# EAGLE board cvocd-a-panel (EAGLE 9.5.2), part 1 of 2
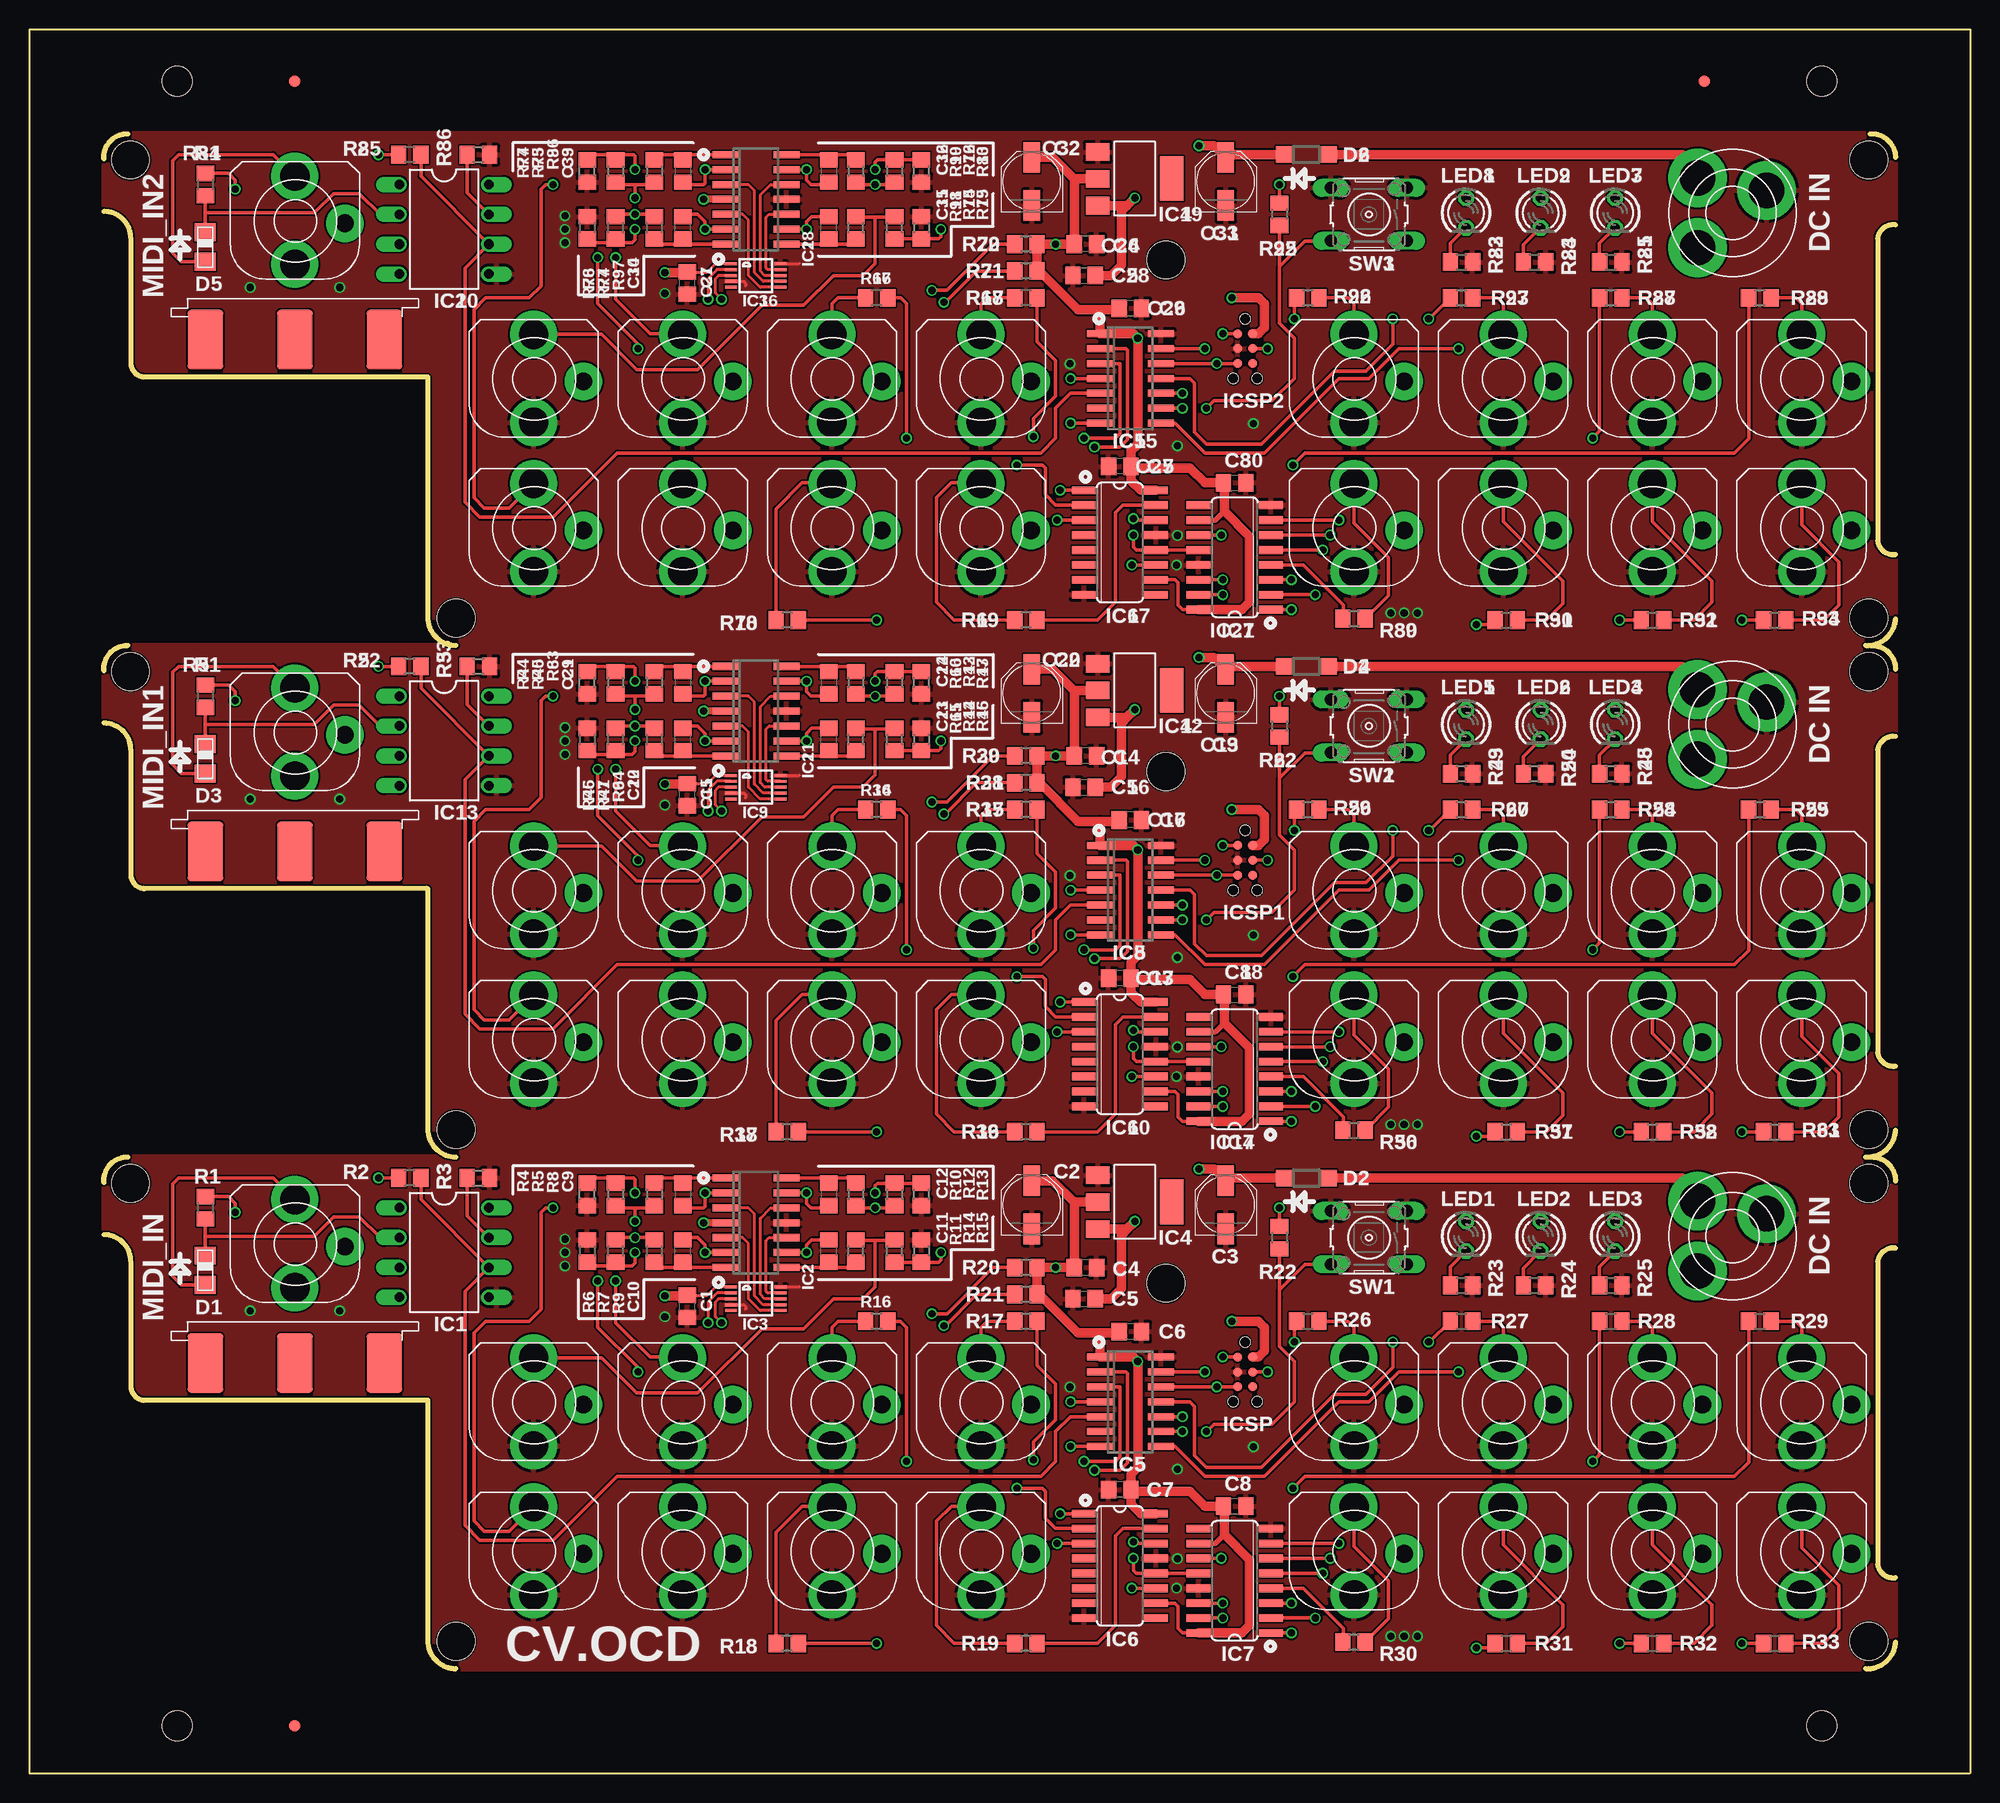
[diagram p0: board, top side]
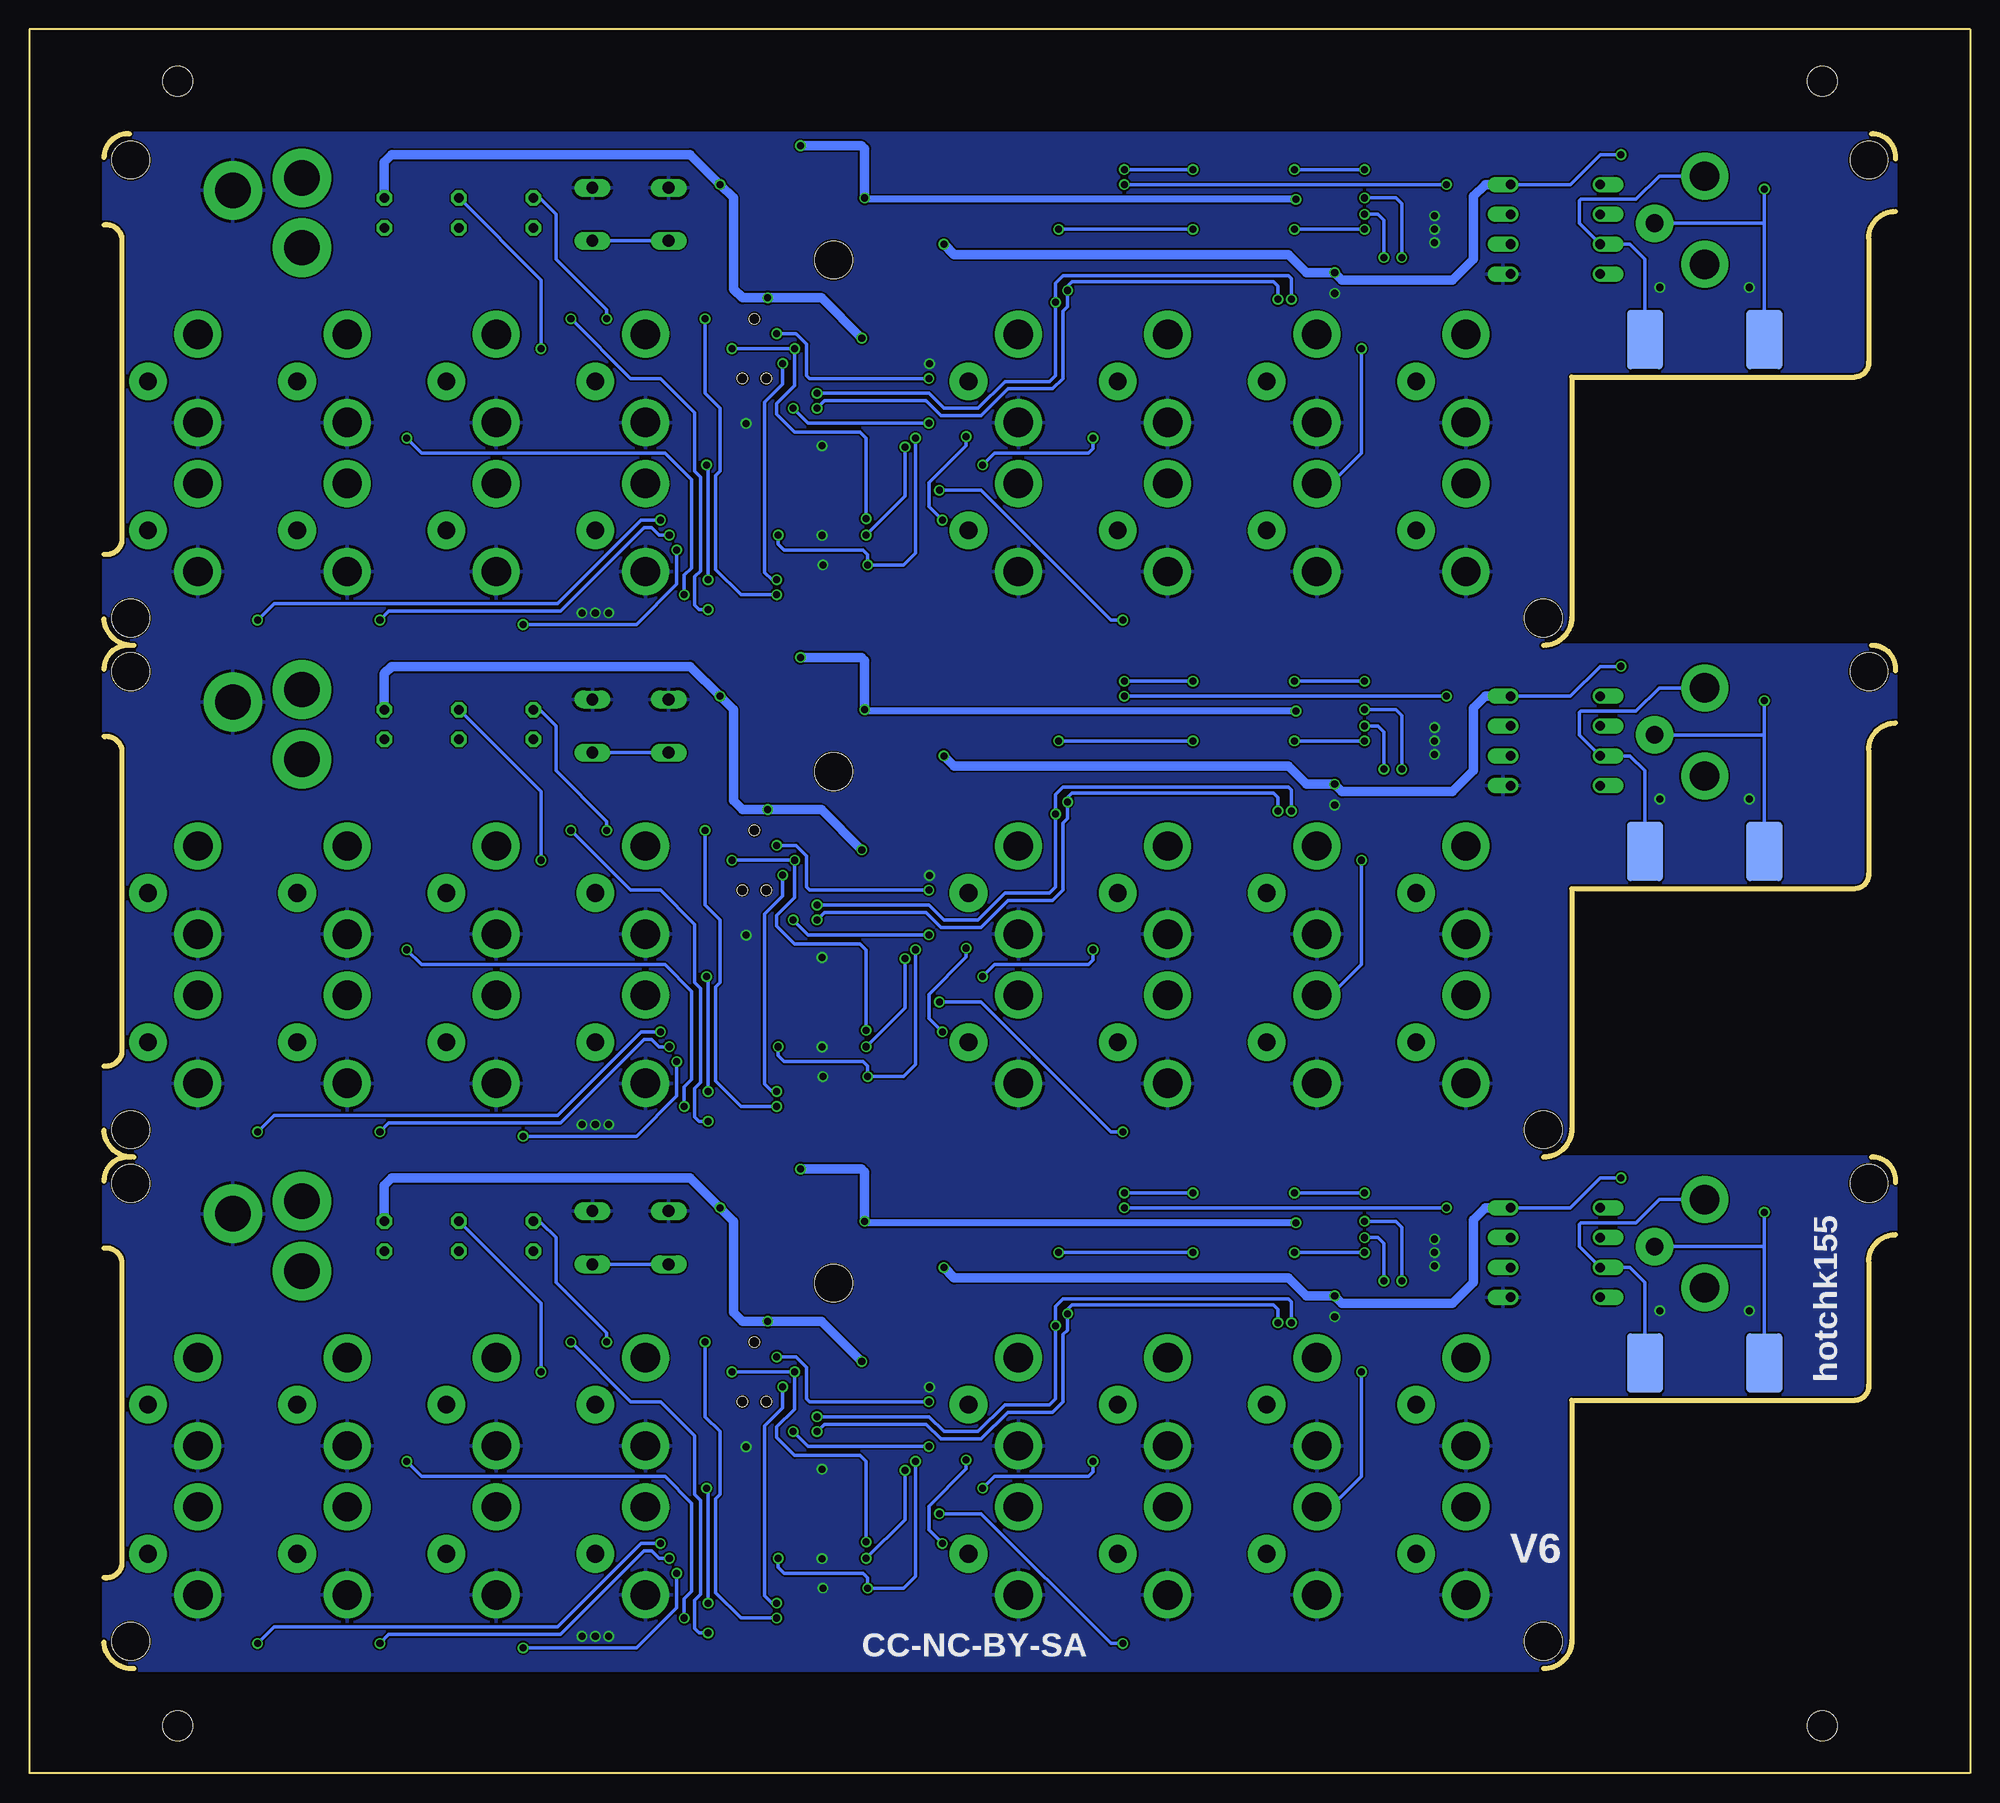
[diagram p1: board, bottom side, seen from below]

Size 165.23 x 148.46 mm. Coordinates in mm from the lower left corner, seen from the top.
Outline: 156.34,8.89 arc90 158.88,11.18
Outline: 156.72,52.45 156.84,52.45 arc-90 158.88,50.42
Outline: 6.35,50.29 arc-97 8.38,52.45
Outline: 36.32,8.89 arc-90 33.91,11.3 33.91,31.75 9.78,31.75 arc-90 8.64,33.02 8.64,43.56 arc90 6.35,45.85
Outline: 158.88,44.7 arc90 157.35,43.56 157.35,17.78 arc90 158.88,16.64
Outline: 156.34,52.45 arc90 158.88,54.74
Outline: 156.72,96.01 156.84,96.01 arc-90 158.88,93.98
Outline: 6.35,93.85 arc-97 8.38,96.01
Outline: 36.32,52.45 arc-90 33.91,54.86 33.91,75.31 9.78,75.31 arc-90 8.64,76.58 8.64,87.12 arc90 6.35,89.41
Outline: 158.88,88.27 arc90 157.35,87.12 157.35,61.34 arc90 158.88,60.2
Outline: 156.34,96.01 arc90 158.88,98.3
Outline: 156.72,139.57 156.84,139.57 arc-90 158.88,137.54
Outline: 6.35,137.41 arc-97 8.38,139.57
Outline: 36.32,96.01 arc-90 33.91,98.42 33.91,118.87 9.78,118.87 arc-90 8.64,120.14 8.64,130.68 arc90 6.35,132.97
Outline: 158.88,131.83 arc90 157.35,130.68 157.35,104.9 arc90 158.88,103.76
Outline: 0,0 165.23,0 165.23,148.46 0,148.46 0,0
Copper layers (1*16): Top 0.035mm / dielectric 1.5mm / Bottom 0.035mm
Design rules "hackvana": minimum track width 6mil, minimum drill 0.3mm, track to track 6mil, track to pad 9mil, pad to pad 6mil, via to via 6mil, smd to smd 0mil, copper to edge 6mil, drill to drill 6mil, minimum pad ring 10mil, minimum via ring 6mil, stop-mask expansion 2mil, vias tented up to drill 100mil, thermal gap 10mil
Holes 3.2 mm at 36.32,11.22 156.6,11.22 8.6,50.22 156.6,50.22 96.77,41.71 36.32,54.78 156.6,54.78 8.6,93.78 156.6,93.78 96.77,85.27 36.32,98.34 156.6,98.34 8.6,137.34 156.6,137.34 96.77,128.83
Holes 2.54 mm at 12.6,144.03 12.6,4.03 152.6,144.03 152.6,4.03

## Footprints (pad centres in the part's own frame; a part is rotated, then mirrored left to right if it is on the bottom)
C0805 = smd 1.3 x 1.5: 1 -0.95,0; 2 0.95,0
PANASONIC_C = smd 2.6 x 1.4: + 2.05,0; - -2.05,0
VERTICAL_3_5MM_SOCKET = drill 2.5 pad 4: 2 0,-3.75; 4 0,3.75 | drill 1.5 pad 3.2: 3 4.25,-0.25
0805DIODE = smd 1.524 x 1.778: A -1.262,-0.005; C 1.238,-0.005
SOD123 = smd 1.4 x 1.4: A 1.9,0; C -1.9,0
FIDUCIAL_1MM = smd 1 x 1: 1 0,0
DIL08 = drill 0.813 offset: 1 -3.81,-3.81; 2 -1.27,-3.81; 3 1.27,-3.81; 4 3.81,-3.81; 5 3.81,3.81; 6 1.27,3.81; 7 -1.27,3.81; 8 -3.81,3.81
SO14 = smd 0.6 x 2.2: 1 -3.81,-2.6; 2 -2.54,-2.6; 3 -1.27,-2.6; 4 0,-2.6; 5 1.27,-2.6; 6 2.54,-2.6; 7 3.81,-2.6; 8 3.81,2.6; 9 2.54,2.6; 10 1.27,2.6; 11 0,2.6; 12 -1.27,2.6; 13 -2.54,2.6; 14 -3.81,2.6
MSOP10 = smd 0.25 x 1: 1 -1,-2.113; 2 -0.5,-2.113; 3 0,-2.113; 4 0.5,-2.113; 5 1,-2.113; 6 1,2.113; 7 0.5,2.113; 8 0,2.113; 9 -0.5,2.113; 10 -1,2.113
SOT223 = smd 1.499 x 2.007: 1 -2.261,-3.15; 2 0.025,-3.15; 3 2.311,-3.15 | smd 3.81 x 2.007: 4 0,3.15
SO16 = smd 0.66 x 2.032: 1 -4.445,-3.073; 2 -3.175,-3.073; 3 -1.905,-3.073; 4 -0.635,-3.073; 5 0.635,-3.073; 6 1.905,-3.073; 7 3.175,-3.073; 8 4.445,-3.073; 9 4.445,3.073; 10 3.175,3.073; 11 1.905,3.073; 12 0.635,3.073; 13 -0.635,3.073; 14 -1.905,3.073; 15 -3.175,3.073; 16 -4.445,3.073
TC2030-MCP-NL = smd 0.787 x 0.787: 1 1.27,-0.635; 2 1.27,0.635; 3 2.54,-0.635; 4 2.54,0.635; 5 3.81,-0.635; 6 3.81,0.635 | hole 0.889: 0,0; 5.08,-1.016; 5.08,1.016
LED3MM = drill 0.813 octagon: A -1.27,0; K 1.27,0
EDGEDIN = smd 3.048 x 5.08: 1 -7.62,-10.16; 2 0,-10.16; 3 7.62,-10.16 | smd 3.048 x 5.08 bottom: 4 -5.08,-10.16; 5 5.08,-10.16
R0805 = smd 1.3 x 1.5: 1 -0.95,0; 2 0.95,0
B3F-10XX = drill 1.016 long: 1 -3.251,2.261; 2 3.251,2.261; 3 -3.251,-2.261; 4 3.251,-2.261
PWR_SOCKET_2_1MM = drill 3 pad 5: BARREL 0,4.2; NC -4.2,0; PIN 3.4,-0.7

## Placement (x,y rotation side)
C1  100n  [C0805]  56.01,39.75 90 top
C2  4u7  [PANASONIC_C]  85.34,48.39 90 top
C3  4u7  [PANASONIC_C]  101.85,48.39 90 top
C4  100n  [C0805]  89.92,43.05 180 top
C5  100n  [C0805]  89.79,40.39 0 top
C6  100n  [C0805]  93.73,37.59 180 top
C7  100n  [C0805]  92.84,24.13 180 top
C8  100n  [C0805]  102.62,22.73 0 top
C9  20p  [C0805]  55.63,49.28 270 top
C10  20p  [C0805]  55.63,44.45 90 top
C11  20p  [C0805]  68.07,44.45 90 top
C12  20p  [C0805]  68.07,49.28 270 top
C13  100n  [C0805]  92.84,67.69 180 top
C14  100n  [C0805]  89.92,86.61 180 top
C15  100n  [C0805]  56.01,83.31 90 top
C16  100n  [C0805]  89.79,83.95 0 top
C17  100n  [C0805]  93.73,81.15 180 top
C18  100n  [C0805]  102.62,66.29 0 top
C19  4u7  [PANASONIC_C]  101.85,91.95 90 top
C20  4u7  [PANASONIC_C]  85.34,91.95 90 top
C21  20p  [C0805]  55.63,92.84 270 top
C22  20p  [C0805]  55.63,88.01 90 top
C23  20p  [C0805]  68.07,88.01 90 top
C24  20p  [C0805]  68.07,92.84 270 top
C25  100n  [C0805]  92.84,111.25 180 top
C26  100n  [C0805]  89.92,130.17 180 top
C27  100n  [C0805]  56.01,126.87 90 top
C28  100n  [C0805]  89.79,127.51 0 top
C29  100n  [C0805]  93.73,124.71 180 top
C30  100n  [C0805]  102.62,109.86 0 top
C31  4u7  [PANASONIC_C]  101.85,135.51 90 top
C32  4u7  [PANASONIC_C]  85.34,135.51 90 top
C33  20p  [C0805]  55.63,136.4 270 top
C34  20p  [C0805]  55.63,131.57 90 top
C35  20p  [C0805]  68.07,131.57 90 top
C36  20p  [C0805]  68.07,136.4 270 top
CVA  VERTICAL_3_5MM_SOCKET  [VERTICAL_3_5MM_SOCKET]  42.93,31.62 0 top
CVA1  VERTICAL_3_5MM_SOCKET  [VERTICAL_3_5MM_SOCKET]  42.93,75.18 0 top
CVA2  VERTICAL_3_5MM_SOCKET  [VERTICAL_3_5MM_SOCKET]  42.93,118.75 0 top
CVB  VERTICAL_3_5MM_SOCKET  [VERTICAL_3_5MM_SOCKET]  55.63,31.62 0 top
CVB1  VERTICAL_3_5MM_SOCKET  [VERTICAL_3_5MM_SOCKET]  55.63,75.18 0 top
CVB2  VERTICAL_3_5MM_SOCKET  [VERTICAL_3_5MM_SOCKET]  55.63,118.75 0 top
CVC  VERTICAL_3_5MM_SOCKET  [VERTICAL_3_5MM_SOCKET]  42.93,18.92 0 top
CVC1  VERTICAL_3_5MM_SOCKET  [VERTICAL_3_5MM_SOCKET]  42.93,62.48 0 top
CVC2  VERTICAL_3_5MM_SOCKET  [VERTICAL_3_5MM_SOCKET]  42.93,106.05 0 top
CVD  VERTICAL_3_5MM_SOCKET  [VERTICAL_3_5MM_SOCKET]  55.63,18.92 0 top
CVD1  VERTICAL_3_5MM_SOCKET  [VERTICAL_3_5MM_SOCKET]  55.63,62.48 0 top
CVD2  VERTICAL_3_5MM_SOCKET  [VERTICAL_3_5MM_SOCKET]  55.63,106.05 0 top
D1  0805DIODE  [0805DIODE]  14.99,42.8 270 top
D2  1N5819  [SOD123]  108.71,50.67 0 top
D3  0805DIODE  [0805DIODE]  14.99,86.36 270 top
D4  1N5819  [SOD123]  108.71,94.23 0 top
D5  0805DIODE  [0805DIODE]  14.99,129.92 270 top
D6  1N5819  [SOD123]  108.71,137.79 0 top
E$1  [FIDUCIAL_1MM]  22.6,144.03 0 top
E$2  [FIDUCIAL_1MM]  142.6,144.03 0 top
E$3  [FIDUCIAL_1MM]  22.6,4.03 0 top
GATE1  VERTICAL_3_5MM_SOCKET  [VERTICAL_3_5MM_SOCKET]  68.33,31.62 0 top
GATE2  VERTICAL_3_5MM_SOCKET  [VERTICAL_3_5MM_SOCKET]  81.03,31.62 0 top
GATE3  VERTICAL_3_5MM_SOCKET  [VERTICAL_3_5MM_SOCKET]  68.33,18.92 0 top
GATE4  VERTICAL_3_5MM_SOCKET  [VERTICAL_3_5MM_SOCKET]  81.03,18.92 0 top
GATE5  VERTICAL_3_5MM_SOCKET  [VERTICAL_3_5MM_SOCKET]  112.78,31.62 0 top
GATE6  VERTICAL_3_5MM_SOCKET  [VERTICAL_3_5MM_SOCKET]  125.48,31.62 0 top
GATE7  VERTICAL_3_5MM_SOCKET  [VERTICAL_3_5MM_SOCKET]  138.18,31.62 0 top
GATE8  VERTICAL_3_5MM_SOCKET  [VERTICAL_3_5MM_SOCKET]  150.88,31.62 0 top
GATE9  VERTICAL_3_5MM_SOCKET  [VERTICAL_3_5MM_SOCKET]  112.78,18.92 0 top
GATE10  VERTICAL_3_5MM_SOCKET  [VERTICAL_3_5MM_SOCKET]  125.48,18.92 0 top
GATE11  VERTICAL_3_5MM_SOCKET  [VERTICAL_3_5MM_SOCKET]  138.18,18.92 0 top
GATE12  VERTICAL_3_5MM_SOCKET  [VERTICAL_3_5MM_SOCKET]  150.88,18.92 0 top
GATE13  VERTICAL_3_5MM_SOCKET  [VERTICAL_3_5MM_SOCKET]  81.03,62.48 0 top
GATE14  VERTICAL_3_5MM_SOCKET  [VERTICAL_3_5MM_SOCKET]  68.33,62.48 0 top
GATE15  VERTICAL_3_5MM_SOCKET  [VERTICAL_3_5MM_SOCKET]  68.33,75.18 0 top
GATE16  VERTICAL_3_5MM_SOCKET  [VERTICAL_3_5MM_SOCKET]  81.03,75.18 0 top
GATE17  VERTICAL_3_5MM_SOCKET  [VERTICAL_3_5MM_SOCKET]  112.78,75.18 0 top
GATE18  VERTICAL_3_5MM_SOCKET  [VERTICAL_3_5MM_SOCKET]  125.48,75.18 0 top
GATE19  VERTICAL_3_5MM_SOCKET  [VERTICAL_3_5MM_SOCKET]  138.18,75.18 0 top
GATE20  VERTICAL_3_5MM_SOCKET  [VERTICAL_3_5MM_SOCKET]  150.88,75.18 0 top
GATE21  VERTICAL_3_5MM_SOCKET  [VERTICAL_3_5MM_SOCKET]  112.78,62.48 0 top
GATE22  VERTICAL_3_5MM_SOCKET  [VERTICAL_3_5MM_SOCKET]  125.48,62.48 0 top
GATE23  VERTICAL_3_5MM_SOCKET  [VERTICAL_3_5MM_SOCKET]  138.18,62.48 0 top
GATE24  VERTICAL_3_5MM_SOCKET  [VERTICAL_3_5MM_SOCKET]  150.88,62.48 0 top
GATE25  VERTICAL_3_5MM_SOCKET  [VERTICAL_3_5MM_SOCKET]  81.03,106.05 0 top
GATE26  VERTICAL_3_5MM_SOCKET  [VERTICAL_3_5MM_SOCKET]  68.33,106.05 0 top
GATE27  VERTICAL_3_5MM_SOCKET  [VERTICAL_3_5MM_SOCKET]  68.33,118.75 0 top
GATE28  VERTICAL_3_5MM_SOCKET  [VERTICAL_3_5MM_SOCKET]  81.03,118.75 0 top
GATE29  VERTICAL_3_5MM_SOCKET  [VERTICAL_3_5MM_SOCKET]  112.78,118.75 0 top
GATE30  VERTICAL_3_5MM_SOCKET  [VERTICAL_3_5MM_SOCKET]  125.48,118.75 0 top
GATE31  VERTICAL_3_5MM_SOCKET  [VERTICAL_3_5MM_SOCKET]  138.18,118.75 0 top
GATE32  VERTICAL_3_5MM_SOCKET  [VERTICAL_3_5MM_SOCKET]  150.88,118.75 0 top
GATE33  VERTICAL_3_5MM_SOCKET  [VERTICAL_3_5MM_SOCKET]  112.78,106.05 0 top
GATE34  VERTICAL_3_5MM_SOCKET  [VERTICAL_3_5MM_SOCKET]  125.48,106.05 0 top
GATE35  VERTICAL_3_5MM_SOCKET  [VERTICAL_3_5MM_SOCKET]  138.18,106.05 0 top
GATE36  VERTICAL_3_5MM_SOCKET  [VERTICAL_3_5MM_SOCKET]  150.88,106.05 0 top
IC1  6N138  [DIL08]  35.31,44.32 270 top
IC2  LM324D  [SO14]  61.85,46.86 270 top
IC3  MCP4728_QUAD_DAC  [MSOP10]  61.85,40.39 270 top
IC4  REG1117  [SOT223]  94.11,48.64 270 top
IC5  PIC16F1825SO14  [SO14]  93.73,31.62 270 top
IC6  74HC595D  [SO16]  92.84,17.65 270 top
IC7  74HC595D  [SO16]  102.62,16.38 90 top
IC8  PIC16F1825SO14  [SO14]  93.73,75.18 270 top
IC9  MCP4728_QUAD_DAC  [MSOP10]  61.85,83.95 270 top
IC10  74HC595D  [SO16]  92.84,61.21 270 top
IC11  LM324D  [SO14]  61.85,90.42 270 top
IC12  REG1117  [SOT223]  94.11,92.2 270 top
IC13  6N138  [DIL08]  35.31,87.88 270 top
IC14  74HC595D  [SO16]  102.62,59.94 90 top
IC15  PIC16F1825SO14  [SO14]  93.73,118.75 270 top
IC16  MCP4728_QUAD_DAC  [MSOP10]  61.85,127.51 270 top
IC17  74HC595D  [SO16]  92.84,104.78 270 top
IC18  LM324D  [SO14]  61.85,133.98 270 top
IC19  REG1117  [SOT223]  94.11,135.76 270 top
IC20  6N138  [DIL08]  35.31,131.44 270 top
IC21  74HC595D  [SO16]  102.62,103.5 90 top
ICSP  [TC2030-MCP-NL]  103.51,36.7 270 top
ICSP1  [TC2030-MCP-NL]  103.51,80.26 270 top
ICSP2  [TC2030-MCP-NL]  103.51,123.83 270 top
LED1  [LED3MM]  122.3,45.72 270 top
LED2  [LED3MM]  128.65,45.72 270 top
LED3  [LED3MM]  135,45.72 270 top
LED4  [LED3MM]  135,89.28 270 top
LED5  [LED3MM]  122.3,89.28 270 top
LED6  [LED3MM]  128.65,89.28 270 top
LED7  [LED3MM]  135,132.84 270 top
LED8  [LED3MM]  122.3,132.84 270 top
LED9  [LED3MM]  128.65,132.84 270 top
MIDI  VERTICAL_3_5MM_SOCKET  [VERTICAL_3_5MM_SOCKET]  22.61,45.09 0 top
MIDI1  VERTICAL_3_5MM_SOCKET  [VERTICAL_3_5MM_SOCKET]  22.61,88.65 0 top
MIDI2  VERTICAL_3_5MM_SOCKET  [VERTICAL_3_5MM_SOCKET]  22.61,132.21 0 top
MIDI_IN  DIN5PIN  [EDGEDIN]  22.61,45.09 0 top
MIDI_IN1  DIN5PIN  [EDGEDIN]  22.61,88.65 0 top
MIDI_IN2  DIN5PIN  [EDGEDIN]  22.61,132.21 0 top
R1  220  [R0805]  14.99,48.13 270 top
R2  1k5  [R0805]  32.39,50.67 180 top
R3  1k5  [R0805]  38.23,50.67 0 top
R4  10k/0.1%  [R0805]  47.5,49.28 90 top
R5  10k/0.1%  [R0805]  49.91,49.28 270 top
R6  10k/0.1%  [R0805]  47.5,44.45 270 top
R7  10k/0.1%  [R0805]  49.91,44.45 90 top
R8  1k  [R0805]  53.21,49.28 270 top
R9  1k  [R0805]  53.21,44.45 90 top
R10  1k  [R0805]  70.36,49.28 270 top
R11  1k  [R0805]  70.36,44.45 90 top
R12  10k/0.1%  [R0805]  73.66,49.28 270 top
R13  10k/0.1%  [R0805]  75.95,49.28 90 top
R14  10k/0.1%  [R0805]  73.66,44.45 90 top
R15  10k/0.1%  [R0805]  75.95,44.45 270 top
R16  1k  [R0805]  72.14,38.48 180 top
R17  1k  [R0805]  84.84,38.48 180 top
R18  1k  [R0805]  64.52,11.05 180 top
R19  1k  [R0805]  84.84,11.05 180 top
R20  4k7  [R0805]  84.84,43.05 180 top
R21  4k7  [R0805]  84.84,40.77 180 top
R22  4k7  [R0805]  106.43,45.59 270 top
R23  1k  [R0805]  121.92,41.53 0 top
R24  1k  [R0805]  128.14,41.53 0 top
R25  1k  [R0805]  134.62,41.53 0 top
R26  1k  [R0805]  108.84,38.48 0 top
R27  1k  [R0805]  121.92,38.48 0 top
R28  1k  [R0805]  134.62,38.48 0 top
R29  1k  [R0805]  147.32,38.48 0 top
R30  1k  [R0805]  112.78,11.18 0 top
R31  1k  [R0805]  125.73,11.05 0 top
R32  1k  [R0805]  138.18,11.05 0 top
R33  1k  [R0805]  148.59,11.05 0 top
R34  1k  [R0805]  72.14,82.04 180 top
R35  1k  [R0805]  84.84,82.04 180 top
R36  1k  [R0805]  84.84,54.61 180 top
R37  1k  [R0805]  64.52,54.61 180 top
R38  4k7  [R0805]  84.84,84.33 180 top
R39  4k7  [R0805]  84.84,86.61 180 top
R40  10k/0.1%  [R0805]  49.91,92.84 270 top
R41  10k/0.1%  [R0805]  49.91,88.01 90 top
R42  10k/0.1%  [R0805]  73.66,88.01 90 top
R43  10k/0.1%  [R0805]  73.66,92.84 270 top
R44  10k/0.1%  [R0805]  47.5,92.84 90 top
R45  10k/0.1%  [R0805]  47.5,88.01 270 top
R46  10k/0.1%  [R0805]  75.95,88.01 270 top
R47  10k/0.1%  [R0805]  75.95,92.84 90 top
R48  1k  [R0805]  134.62,85.09 0 top
R49  1k  [R0805]  121.92,85.09 0 top
R50  1k  [R0805]  128.14,85.09 0 top
R51  220  [R0805]  14.99,91.69 270 top
R52  1k5  [R0805]  32.39,94.23 180 top
R53  1k5  [R0805]  38.23,94.23 0 top
R54  1k  [R0805]  134.62,82.04 0 top
R55  1k  [R0805]  147.32,82.04 0 top
R56  1k  [R0805]  112.78,54.74 0 top
R57  1k  [R0805]  125.73,54.61 0 top
R58  1k  [R0805]  138.18,54.61 0 top
R59  1k  [R0805]  108.84,82.04 0 top
R60  1k  [R0805]  121.92,82.04 0 top
R61  1k  [R0805]  148.59,54.61 0 top
R62  4k7  [R0805]  106.43,89.15 270 top
R63  1k  [R0805]  53.21,92.84 270 top
R64  1k  [R0805]  53.21,88.01 90 top
R65  1k  [R0805]  70.36,88.01 90 top
R66  1k  [R0805]  70.36,92.84 270 top
R67  1k  [R0805]  72.14,125.6 180 top
R68  1k  [R0805]  84.84,125.6 180 top
R69  1k  [R0805]  84.84,98.17 180 top
R70  1k  [R0805]  64.52,98.17 180 top
R71  4k7  [R0805]  84.84,127.89 180 top
R72  4k7  [R0805]  84.84,130.17 180 top
R73  10k/0.1%  [R0805]  49.91,136.4 270 top
R74  10k/0.1%  [R0805]  49.91,131.57 90 top
R75  10k/0.1%  [R0805]  73.66,131.57 90 top
R76  10k/0.1%  [R0805]  73.66,136.4 270 top
R77  10k/0.1%  [R0805]  47.5,136.4 90 top
R78  10k/0.1%  [R0805]  47.5,131.57 270 top
R79  10k/0.1%  [R0805]  75.95,131.57 270 top
R80  10k/0.1%  [R0805]  75.95,136.4 90 top
R81  1k  [R0805]  134.62,128.65 0 top
R82  1k  [R0805]  121.92,128.65 0 top
R83  1k  [R0805]  128.14,128.65 0 top
R84  220  [R0805]  14.99,135.25 270 top
R85  1k5  [R0805]  32.39,137.79 180 top
R86  1k5  [R0805]  38.23,137.79 0 top
R87  1k  [R0805]  134.62,125.6 0 top
R88  1k  [R0805]  147.32,125.6 0 top
R89  1k  [R0805]  112.78,98.3 0 top
R90  1k  [R0805]  125.73,98.17 0 top
R91  1k  [R0805]  138.18,98.17 0 top
R92  1k  [R0805]  108.84,125.6 0 top
R93  1k  [R0805]  121.92,125.6 0 top
R94  1k  [R0805]  148.59,98.17 0 top
R95  4k7  [R0805]  106.43,132.72 270 top
R96  1k  [R0805]  53.21,136.4 270 top
R97  1k  [R0805]  53.21,131.57 90 top
R98  1k  [R0805]  70.36,131.57 90 top
R99  1k  [R0805]  70.36,136.4 270 top
SW1  [B3F-10XX]  114.05,45.59 180 top
SW2  [B3F-10XX]  114.05,89.15 180 top
SW3  [B3F-10XX]  114.05,132.72 180 top
U$1  PWR_SOCKET_2_1MM  [PWR_SOCKET_2_1MM]  145,89.28 45 top
U$2  PWR_SOCKET_2_1MM  [PWR_SOCKET_2_1MM]  145,45.72 45 top
U$3  PWR_SOCKET_2_1MM  [PWR_SOCKET_2_1MM]  145,132.84 45 top

## Library data of the parts
C1-C36 R1-R99 = rcl
CVA CVA1 CVA2 CVB CVB1 CVB2 CVC CVC1 CVC2 CVD CVD1 CVD2 GATE1-GATE36 IC3 IC9 IC16 MIDI MIDI1 MIDI2 MIDI_IN MIDI_IN1 MIDI_IN2 U$1-U$3 = jason_eagle6
D1 D3 D5 IC5 IC8 IC15 = jasons_stuff
D2 D4 D6 = diode
E$1-E$3 = adafruit
IC1 IC13 IC20 = optocoupler; MF: VISHAY/TELEFUNKEN; MPN: 6N138; OC_FARNELL: 9860150; OC_NEWARK: 35K5294
IC2 IC11 IC18 = linear
IC4 IC12 IC19 = burr-brown; MPN: REG1117; OC_FARNELL: 1097566; OC_NEWARK: 14P6981
IC6 IC7 IC10 IC14 IC17 IC21 = 74xx-eu
ICSP ICSP1 ICSP2 = tag-connect
LED1-LED9 = led
SW1-SW3 = switch-omron; MPN: B3F-1000; OC_FARNELL: 176432; OC_NEWARK: 36M3542

## Nets
ACT_LED: IC5.11 LED1.A
ACT_LED1: IC8.11 LED5.A
ACT_LED2: IC15.11 LED8.A
GND: C1.1 C2.- C3.- C4.1 C5.1 C6.1 C7.2 C8.2 CVA.2 CVB.2 CVC.2 CVD.2 GATE1.2 GATE2.2 GATE3.2 GATE4.2 GATE5.2 GATE6.2 GATE7.2 GATE8.2 GATE9.2 GATE10.2 GATE11.2 GATE12.2 IC1.5 IC2.11 IC3.4 IC3.10 IC4.1 IC5.14 IC6.8 IC6.13 IC7.8 IC7.13 ICSP.3 R3.2 R4.1 R6.1 R13.1 R15.1 R23.2 R24.2 R25.2 SW1.3 SW1.4 U$2.PIN
GND1: C13.2 C14.1 C15.1 C16.1 C17.1 C18.2 C19.- C20.- CVA1.2 CVB1.2 CVC1.2 CVD1.2 GATE13.2 GATE14.2 GATE15.2 GATE16.2 GATE17.2 GATE18.2 GATE19.2 GATE20.2 GATE21.2 GATE22.2 GATE23.2 GATE24.2 IC8.14 IC9.4 IC9.10 IC10.8 IC10.13 IC11.11 IC12.1 IC13.5 IC14.8 IC14.13 ICSP1.3 R44.1 R45.1 R46.1 R47.1 R48.2 R49.2 R50.2 R53.2 SW2.3 SW2.4 U$1.PIN
GND2: C25.2 C26.1 C27.1 C28.1 C29.1 C30.2 C31.- C32.- CVA2.2 CVB2.2 CVC2.2 CVD2.2 GATE25.2 GATE26.2 GATE27.2 GATE28.2 GATE29.2 GATE30.2 GATE31.2 GATE32.2 GATE33.2 GATE34.2 GATE35.2 GATE36.2 IC15.14 IC16.4 IC16.10 IC17.8 IC17.13 IC18.11 IC19.1 IC20.5 IC21.8 IC21.13 ICSP2.3 R77.1 R78.1 R79.1 R80.1 R81.2 R82.2 R83.2 R86.2 SW3.3 SW3.4 U$3.PIN
MIDI_IN: IC1.6 IC5.5 R2.1
MIDI_IN1: IC8.5 IC13.6 R52.1
MIDI_IN2: IC15.5 IC20.6 R85.1
MIDI_OUT: IC5.6
MIDI_OUT1: IC8.6
MIDI_OUT2: IC15.6
N$1: GATE4.4 R19.2
N$2: C9.1 IC2.1 R8.1
N$3: C10.1 IC2.7 R9.1
N$4: C11.1 IC2.8 R11.1
N$5: C12.1 IC2.14 R10.1
N$6: GATE3.4 R18.2
N$7: GATE1.4 R16.2
N$8: GATE2.4 R17.2
N$9: IC5.7 R22.2 SW1.1 SW1.2
N$10: C9.2 IC2.2 R4.2 R5.1
N$11: C11.2 IC2.9 R14.1 R15.2
N$12: IC6.15 R19.1
N$13: IC6.1 R18.1
N$14: C12.2 IC2.13 R12.1 R13.2
N$15: IC6.3 R17.1
N$16: IC6.2 R16.1
N$17: GATE13.4 R36.2
N$18: CVD.4 R5.2 R8.2
N$19: CVB.4 R7.2 R9.2
N$20: GATE5.4 R26.2
N$21: IC3.2 IC5.10 R21.2
N$22: IC3.3 IC5.9 R20.2
N$23: GATE6.4 R27.2
N$24: GATE7.4 R28.2
N$25: GATE14.4 R37.2
N$26: C10.2 IC2.6 R6.2 R7.1
N$27: GATE15.4 R34.2
N$28: GATE16.4 R35.2
N$29: MIDI.3 MIDI_IN.4 R1.1
N$30: D1.A IC1.2 R1.2
N$31: D1.C IC1.3 MIDI.4 MIDI_IN.5
N$32: GATE8.4 R29.2
N$33: GATE9.4 R30.2
N$34: IC5.4 ICSP.1
N$35: LED3.K R25.1
N$36: LED1.K R23.1
N$37: LED2.K R24.1
N$38: CVA.4 R11.2 R14.2
N$39: GATE10.4 R31.2
N$40: D2.A U$2.BARREL
N$41: GATE11.4 R32.2
N$42: IC1.7 R3.1
N$43: IC7.15 R26.1
N$44: CVC.4 R10.2 R12.2
N$45: IC10.15 R36.1
N$46: IC7.1 R27.1
N$47: IC7.3 R29.1
N$48: IC7.2 R28.1
N$49: IC7.5 R31.1
N$50: IC7.6 R32.1
N$51: IC7.4 R30.1
N$52: GATE12.4 R33.2
N$53: IC7.7 R33.1
N$54: IC10.1 R37.1
N$55: IC10.3 R35.1
N$56: IC10.2 R34.1
N$57: IC8.10 IC9.2 R38.2
N$58: IC8.9 IC9.3 R39.2
N$59: C21.1 IC11.1 R63.1
N$60: C22.1 IC11.7 R64.1
N$61: C23.1 IC11.8 R65.1
N$62: C24.1 IC11.14 R66.1
N$63: C22.2 IC11.6 R41.1 R45.2
N$64: IC8.4 ICSP1.1
N$65: LED4.K R48.1
N$66: LED5.K R49.1
N$67: LED6.K R50.1
N$68: D4.A U$1.BARREL
N$69: MIDI1.3 MIDI_IN1.4 R51.1
N$70: D3.A IC13.2 R51.2
N$71: D3.C IC13.3 MIDI1.4 MIDI_IN1.5
N$72: IC13.7 R53.1
N$73: GATE17.4 R59.2
N$74: GATE18.4 R60.2
N$75: GATE19.4 R54.2
N$76: GATE20.4 R55.2
N$77: GATE21.4 R56.2
N$78: GATE22.4 R57.2
N$79: GATE23.4 R58.2
N$80: IC14.15 R59.1
N$81: IC14.1 R60.1
N$82: IC14.3 R55.1
N$83: IC14.2 R54.1
N$84: IC14.5 R57.1
N$85: IC14.6 R58.1
N$86: IC14.4 R56.1
N$87: GATE24.4 R61.2
N$88: IC14.7 R61.1
N$89: IC8.7 R62.2 SW2.1 SW2.2
N$90: CVD1.4 R40.2 R63.2
N$91: CVB1.4 R41.2 R64.2
N$92: CVA1.4 R42.2 R65.2
N$93: CVC1.4 R43.2 R66.2
N$94: C21.2 IC11.2 R40.1 R44.2
N$95: C23.2 IC11.9 R42.1 R46.2
N$96: C24.2 IC11.13 R43.1 R47.2
N$97: GATE25.4 R69.2
N$98: GATE26.4 R70.2
N$99: GATE27.4 R67.2
N$100: GATE28.4 R68.2
N$101: IC17.15 R69.1
N$102: IC17.1 R70.1
N$103: IC17.3 R68.1
N$104: IC17.2 R67.1
N$105: IC15.10 IC16.2 R71.2
N$106: IC15.9 IC16.3 R72.2
N$107: C33.1 IC18.1 R96.1
N$108: C34.1 IC18.7 R97.1
N$109: C35.1 IC18.8 R98.1
N$110: C36.1 IC18.14 R99.1
N$111: C34.2 IC18.6 R74.1 R78.2
N$112: IC15.4 ICSP2.1
N$113: LED7.K R81.1
N$114: LED8.K R82.1
N$115: LED9.K R83.1
N$116: D6.A U$3.BARREL
N$117: MIDI2.3 MIDI_IN2.4 R84.1
N$118: D5.A IC20.2 R84.2
N$119: D5.C IC20.3 MIDI2.4 MIDI_IN2.5
N$120: IC20.7 R86.1
N$121: GATE29.4 R92.2
N$122: GATE30.4 R93.2
N$123: GATE31.4 R87.2
N$124: GATE32.4 R88.2
N$125: GATE33.4 R89.2
N$126: GATE34.4 R90.2
N$127: GATE35.4 R91.2
N$128: IC21.15 R92.1
N$129: IC21.1 R93.1
N$130: IC21.3 R88.1
N$131: IC21.2 R87.1
N$132: IC21.5 R90.1
N$133: IC21.6 R91.1
N$134: IC21.4 R89.1
N$135: GATE36.4 R94.2
N$136: IC21.7 R94.1
N$137: IC15.7 R95.2 SW3.1 SW3.2
N$138: CVD2.4 R73.2 R96.2
N$139: CVB2.4 R74.2 R97.2
N$140: CVA2.4 R75.2 R98.2
N$141: CVC2.4 R76.2 R99.2
N$142: C33.2 IC18.2 R73.1 R77.2
N$143: C35.2 IC18.9 R75.1 R79.2
N$144: C36.2 IC18.13 R76.1 R80.2
SR_CLK: IC5.3 IC6.11 IC7.11
SR_CLK1: IC8.3 IC10.11 IC14.11
SR_CLK2: IC15.3 IC17.11 IC21.11
SR_DAT: IC5.13 IC6.14 ICSP.4
SR_DAT1: IC8.13 IC10.14 ICSP1.4
SR_DAT2: IC5.12 IC7.14 ICSP.5
SR_DAT3: IC8.12 IC14.14 ICSP1.5
SR_DAT4: IC15.13 IC17.14 ICSP2.4
SR_DAT5: IC15.12 IC21.14 ICSP2.5
SR_RCK: IC5.2 IC6.12 IC7.12
SR_RCK1: IC8.2 IC10.12 IC14.12
SR_RCK2: IC15.2 IC17.12 IC21.12
STATUS_LED: IC5.8 LED2.A
STATUS_LED1: IC8.8 LED6.A
STATUS_LED2: IC15.8 LED9.A
VDD: C1.2 C2.+ C4.2 C6.2 C7.1 C8.1 IC1.8 IC3.1 IC4.2 IC5.1 IC6.10 IC6.16 IC7.10 IC7.16 ICSP.2 LED3.A R2.2 R20.1 R21.1 R22.1
VDD1: C13.1 C14.2 C15.2 C17.2 C18.1 C20.+ IC8.1 IC9.1 IC10.10 IC10.16 IC12.2 IC13.8 IC14.10 IC14.16 ICSP1.2 LED4.A R38.1 R39.1 R52.2 R62.1
VDD2: C25.1 C26.2 C27.2 C29.2 C30.1 C32.+ IC15.1 IC16.1 IC17.10 IC17.16 IC19.2 IC20.8 IC21.10 IC21.16 ICSP2.2 LED7.A R71.1 R72.1 R85.2 R95.1
VIN: C3.+ C5.2 D2.C IC2.4 IC4.3
VIN1: C16.2 C19.+ D4.C IC11.4 IC12.3
VIN2: C28.2 C31.+ D6.C IC18.4 IC19.3
VOUTA: IC2.5 IC3.6
VOUTA1: IC9.6 IC11.5
VOUTA2: IC16.6 IC18.5
VOUTB: IC2.3 IC3.7
VOUTB1: IC9.7 IC11.3
VOUTB2: IC16.7 IC18.3
VOUTC: IC2.12 IC3.8
VOUTC1: IC9.8 IC11.12
VOUTC2: IC16.8 IC18.12
VOUTD: IC2.10 IC3.9
VOUTD1: IC9.9 IC11.10
VOUTD2: IC16.9 IC18.10